# EAGLE board Conception_analyse_schemas_pcb (EAGLE 9.7.0)
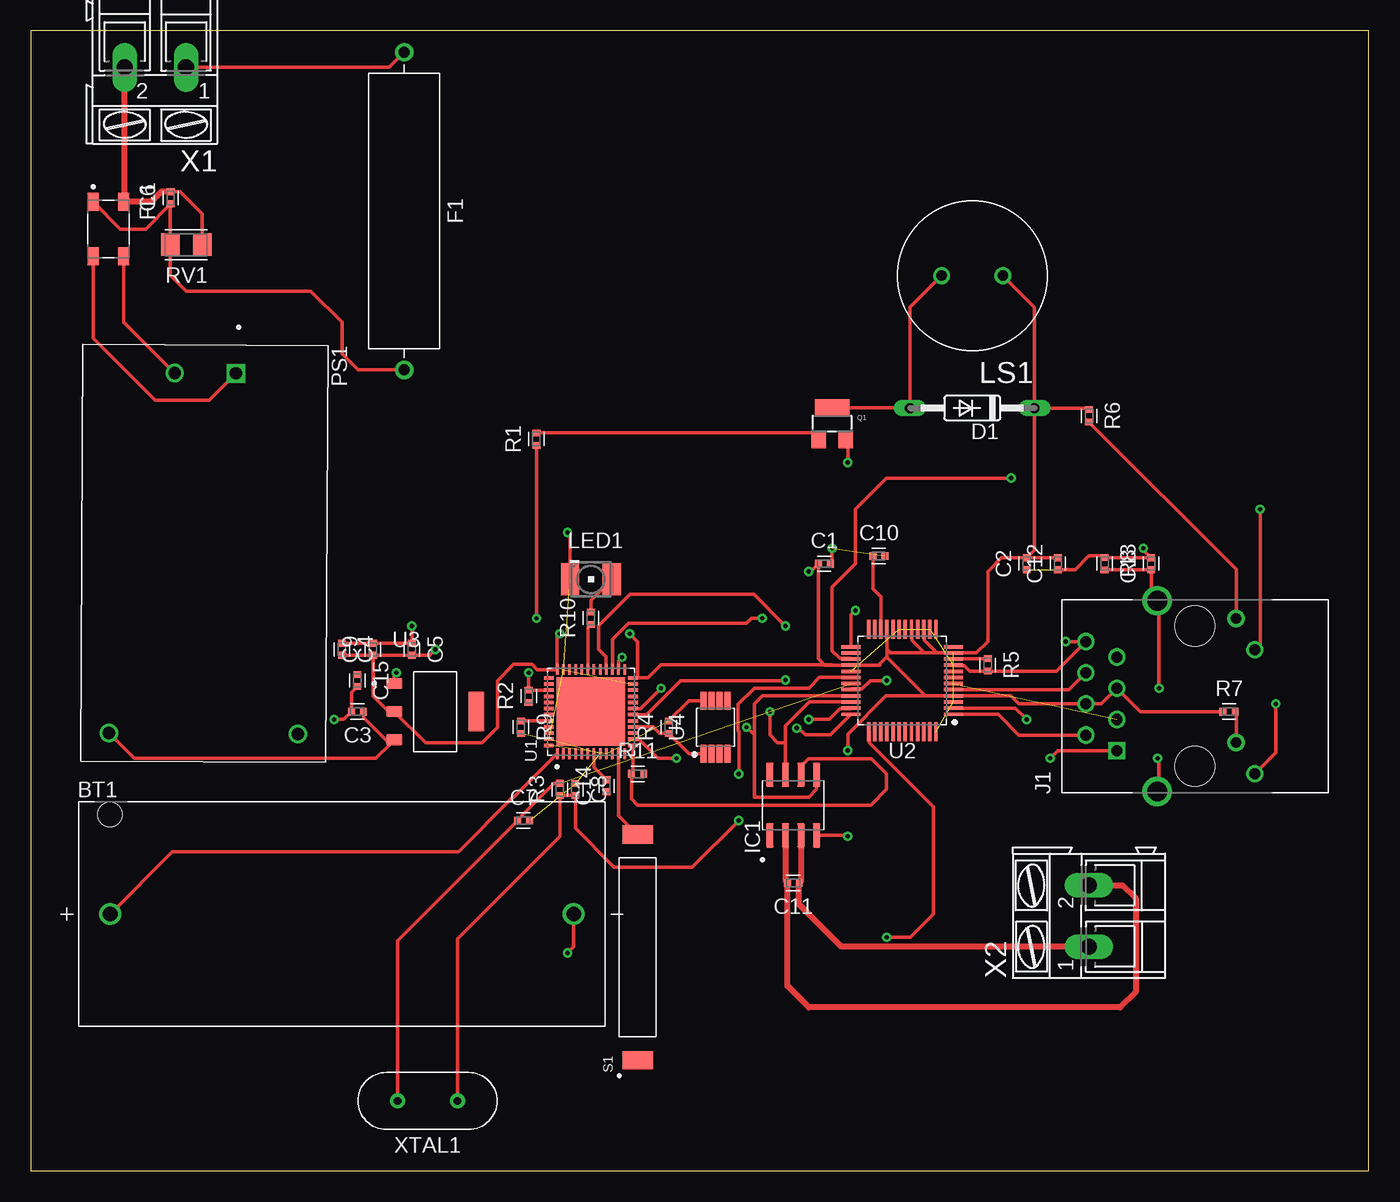
[diagram p0: board, top side]
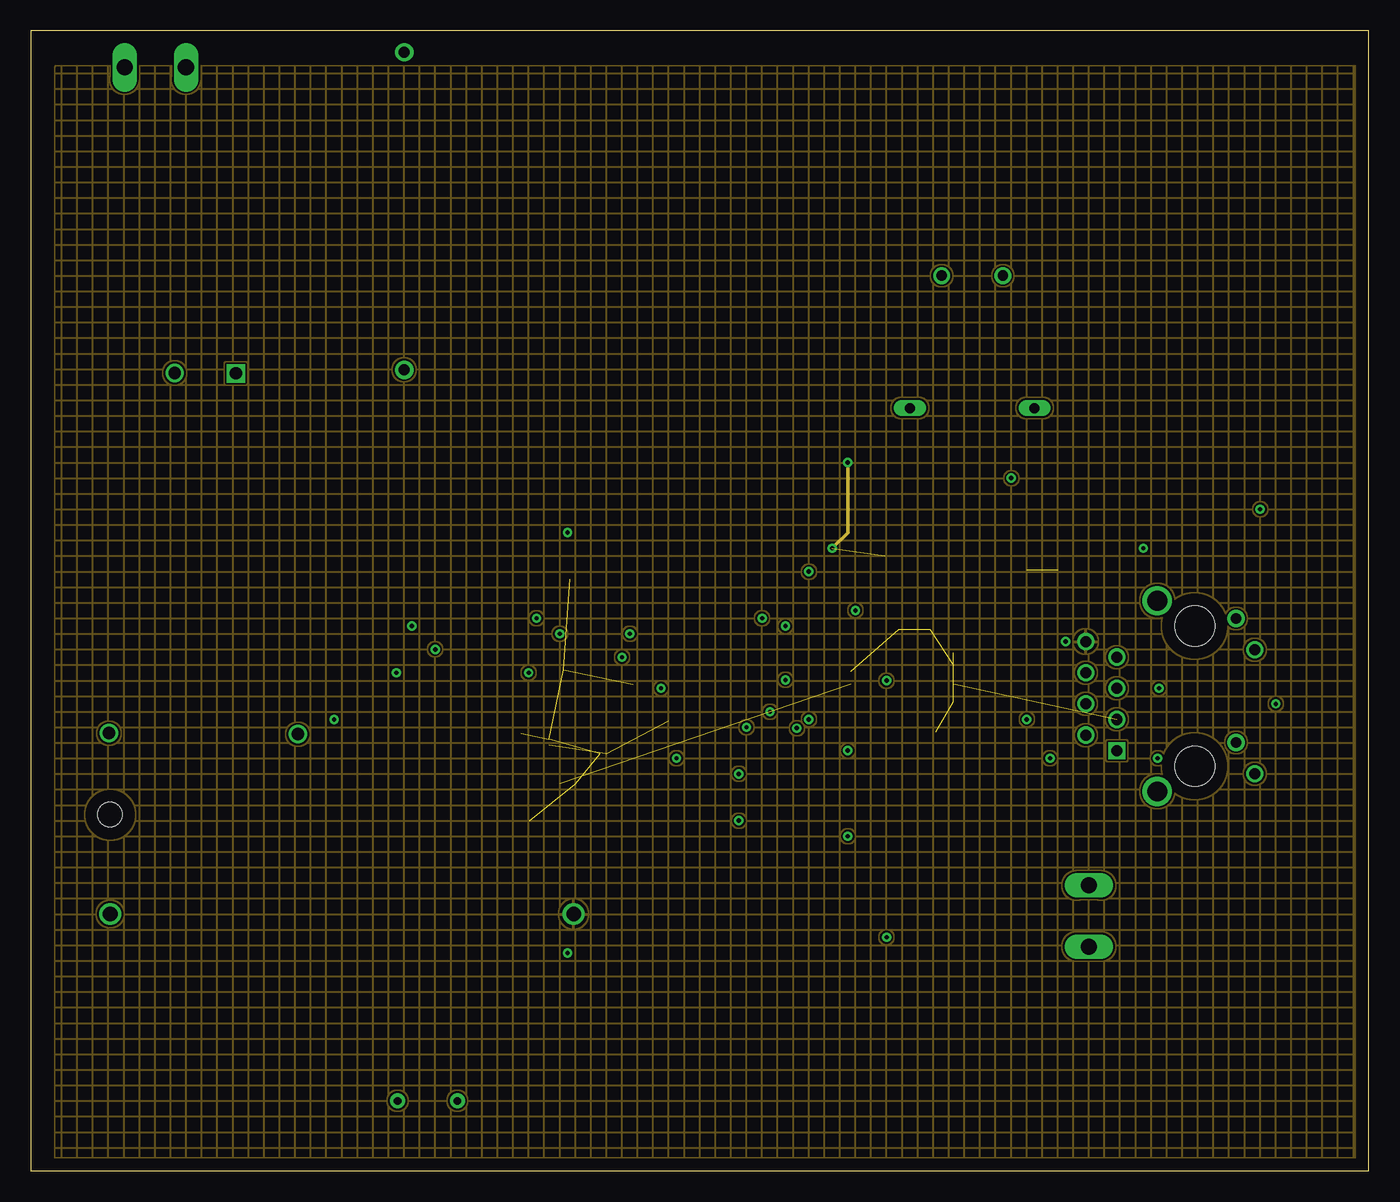
[diagram p1: board, inner layer Route2]
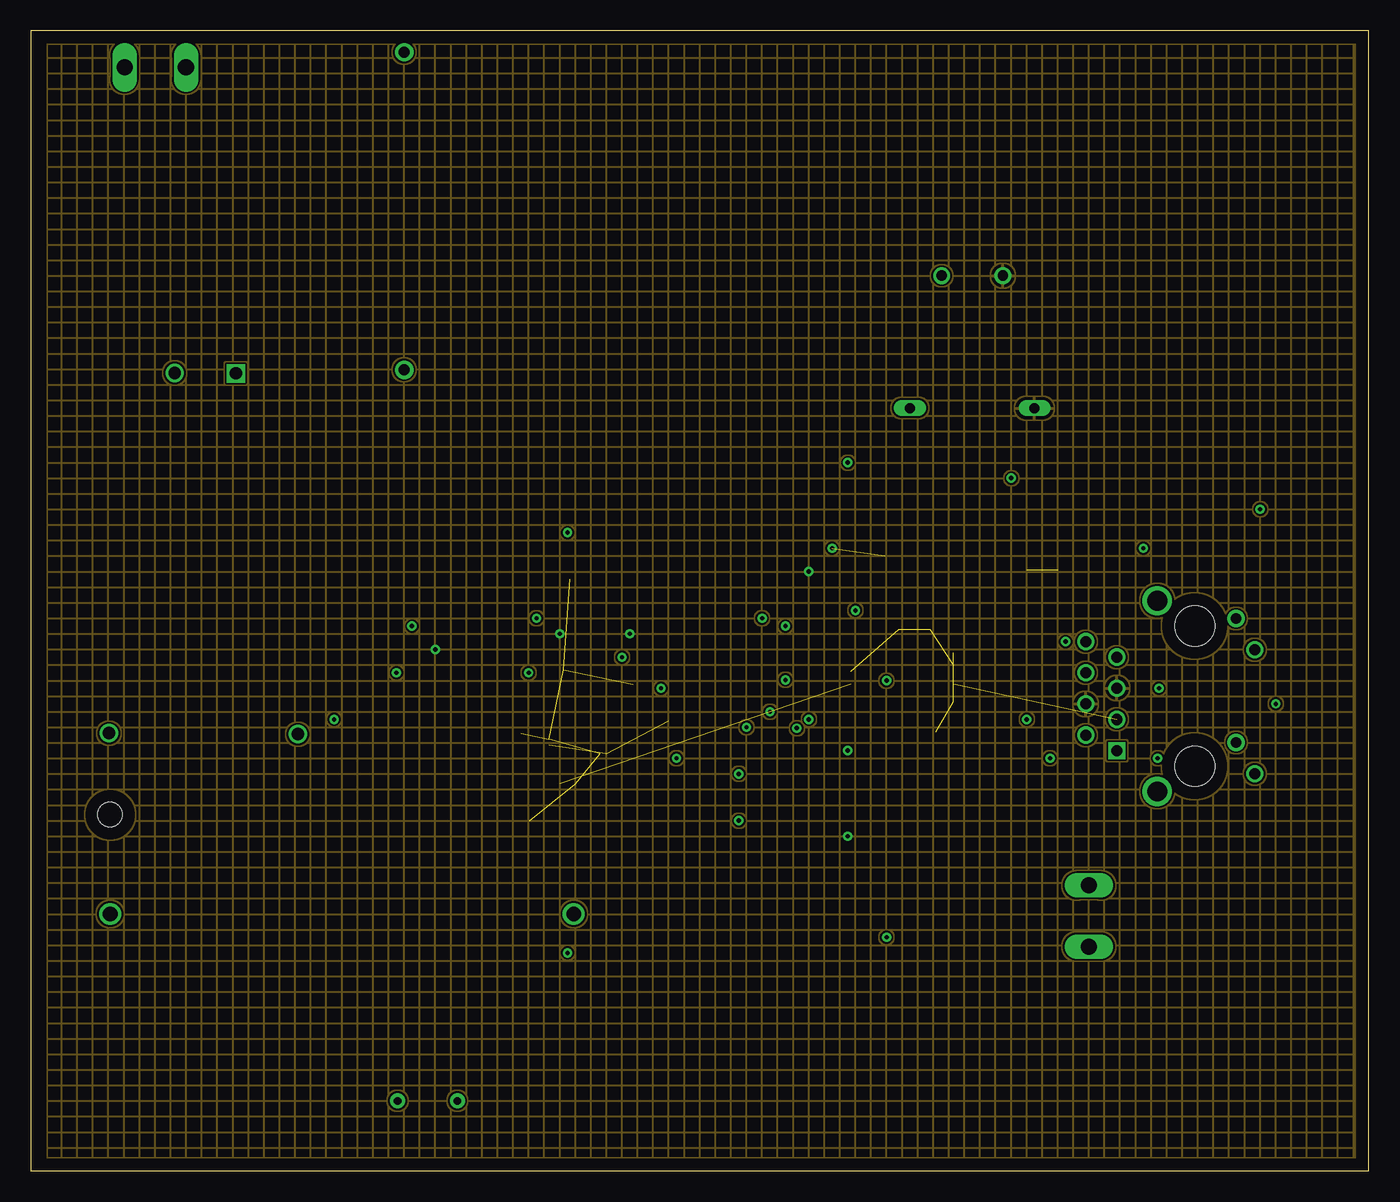
[diagram p2: board, inner layer Route15]
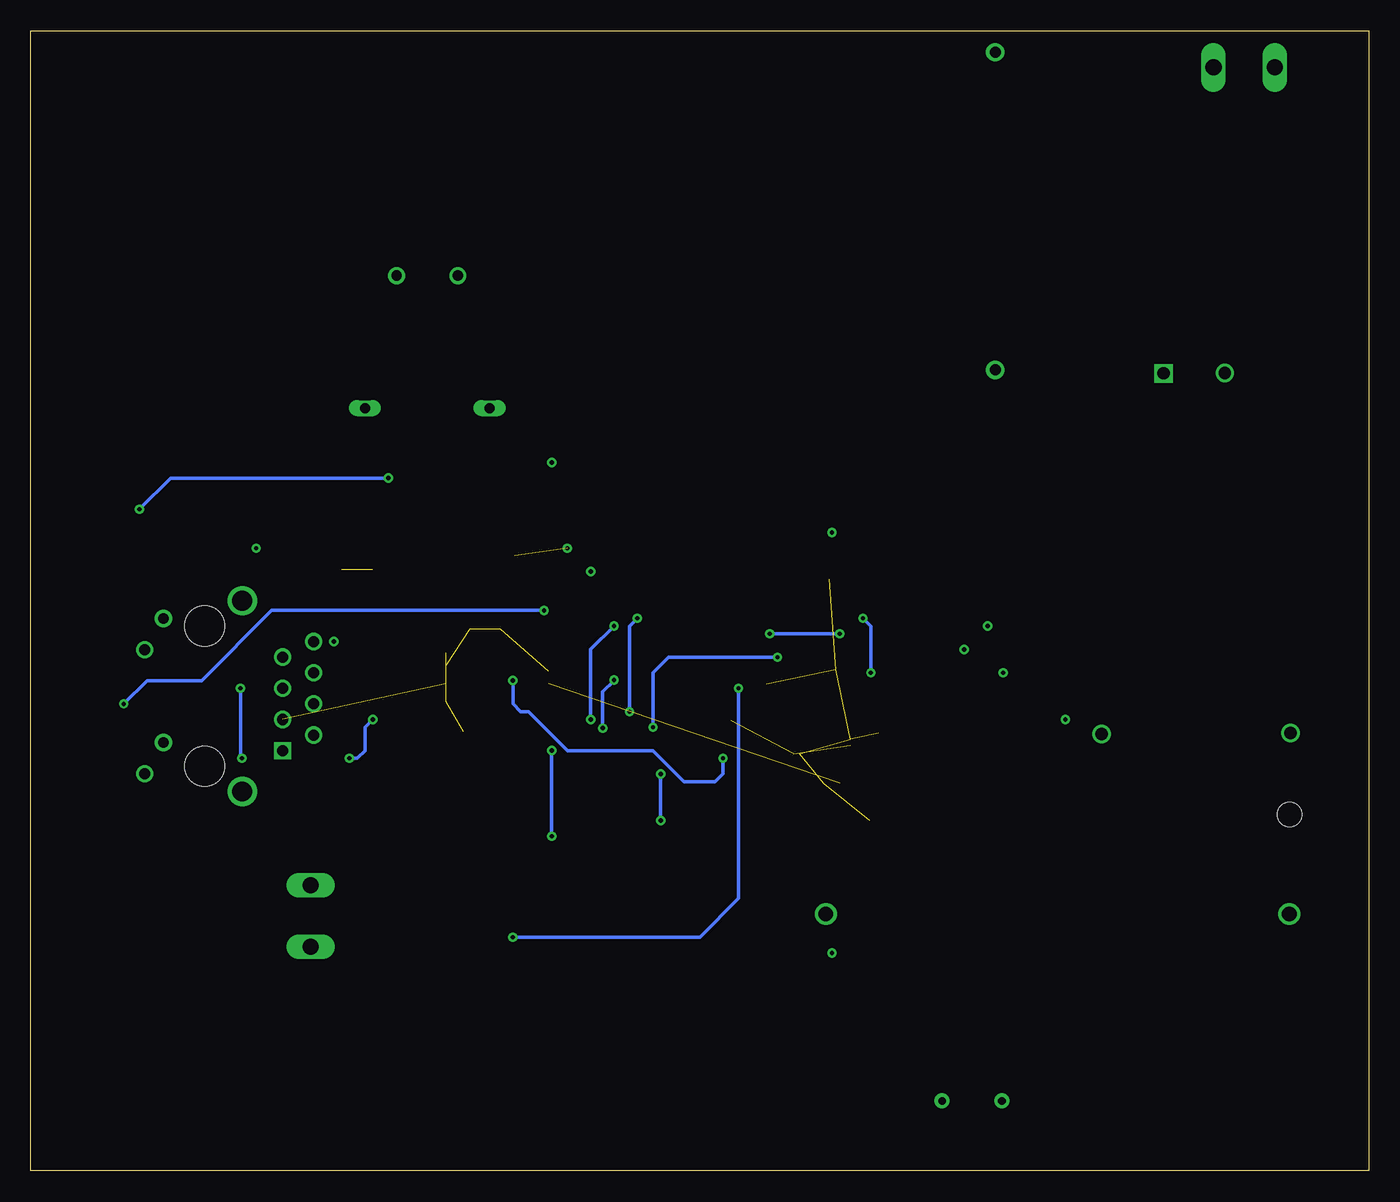
[diagram p3: board, bottom side, seen from below]

Size 109.2 x 93.02 mm. Coordinates in mm from the lower left corner, seen from the top.
Outline: 0,0 109.2,0 109.2,93.02 0,93.02 0,0
Copper layers (1+2*15+16): Top 0.035mm / dielectric 1.5mm / Route2 0.035mm / dielectric 0.15mm / Route15 0.035mm / dielectric 0.2mm / Bottom 0.035mm
Design rules "Fusion Electronics Design Rules *": minimum track width 0.3mm, minimum drill 0.35mm, track to track 6mil, track to pad 6mil, pad to pad 6mil, via to via 6mil, smd to smd 6mil, copper to edge 40mil, drill to drill 6mil, minimum pad ring 10mil, minimum via ring 8mil, stop-mask expansion 4mil, vias tented up to drill 9999mil, thermal gap 10mil

## Footprints (pad centres in the part's own frame; a part is rotated, then mirrored left to right if it is on the bottom)
BAT_1051 = drill 1.19: N 18.91,0; P -18.91,0 | hole 1.98: -18.91,8.1
CAPC1005X60 = smd 0.56 x 0.629: 1 -0.485,0; 2 0.485,0
DO35-10 = drill 0.813 long: A 5.08,0; C -5.08,0
FUSAD2590W70L2150D550B = drill 0.9 pad 1.5: 1 -12.95,0; 2 12.95,0
FIL_DLW43SH510XK2K = smd 1.45 x 0.9: 1 -2.225,-1.25; 2 2.225,-1.25; 3 2.225,1.25; 4 -2.225,1.25
SOIC127P600X175-8N = smd 1.97 x 0.59: 1 -2.475,1.905; 2 -2.475,0.635; 3 -2.475,-0.635; 4 -2.475,-1.905; 5 2.475,-1.905; 6 2.475,-0.635; 7 2.475,0.635; 8 2.475,1.905
CONN_RJMG1BD3B8K1ANR = drill 1.6: 1 -7.775,3.05; 2 7.775,3.05 | drill 0.89: L1 6.325,-3.38; L2 3.785,-4.9; L3 -3.785,-3.38; L4 -6.325,-4.9 | drill 0.9 square: R1 -4.45,6.34 | drill 0.9: R2 -3.18,8.88; R3 -1.91,6.34; R4 -0.63,8.88; R5 0.64,6.34; R6 1.91,8.88; R7 3.18,6.34; R8 4.45,8.88 | hole 3.25: -5.715,0; 5.715,0
PLCC2 = smd 2.6 x 1.5: A 0,1.7; C 0,-1.7
XDCR_PS1240P02BT = drill 0.85 pad 1.28: 1 -2.5,0; 2 2.5,0
CONV_HLK-PM01 = drill 1 square: 1 -14.7,2.5 | drill 1: 2 -14.7,-2.5; 3 14.7,7.7; 4 14.7,-7.7
SOT23-W = smd 1.2 x 1.4: 1 -1.1,-1.3; 2 1.1,-1.3 | smd 2.8 x 1.4: 3 0,1.3
RESC1005X40 = smd 0.535 x 0.644: 1 -0.507,0; 2 0.507,0
VARC3216X102N = smd 1.505 x 1.815: 1 -1.305,0; 2 1.305,0
SW_PMC-1001THY = smd 1.5 x 2.5: 1 -9.2,0; 2 9.2,0
QFN50P700X700X60-49N = smd 0.86 x 0.27: 1 -3.435,2.75; 2 -3.435,2.25; 3 -3.435,1.75; 4 -3.435,1.25; 5 -3.435,0.75; 6 -3.435,0.25; 7 -3.435,-0.25; 8 -3.435,-0.75; 9 -3.435,-1.25; 10 -3.435,-1.75; 11 -3.435,-2.25; 12 -3.435,-2.75; 25 3.435,-2.75; 26 3.435,-2.25; 27 3.435,-1.75; 28 3.435,-1.25; 29 3.435,-0.75; 30 3.435,-0.25; 31 3.435,0.25; 32 3.435,0.75; 33 3.435,1.25; 34 3.435,1.75; 35 3.435,2.25; 36 3.435,2.75 | smd 0.27 x 0.86: 13 -2.75,-3.435; 14 -2.25,-3.435; 15 -1.75,-3.435; 16 -1.25,-3.435; 17 -0.75,-3.435; 18 -0.25,-3.435; 19 0.25,-3.435; 20 0.75,-3.435; 21 1.25,-3.435; 22 1.75,-3.435; 23 2.25,-3.435; 24 2.75,-3.435; 37 2.75,3.435; 38 2.25,3.435; 39 1.75,3.435; 40 1.25,3.435; 41 0.75,3.435; 42 0.25,3.435; 43 -0.25,3.435; 44 -0.75,3.435; 45 -1.25,3.435; 46 -1.75,3.435; 47 -2.25,3.435; 48 -2.75,3.435 | smd 5.6 x 5.6: 49 0,0
QFP50P900X900X160-48N = smd 1.559 x 0.28: 1 -4.178,2.75; 2 -4.178,2.25; 3 -4.178,1.75; 4 -4.178,1.25; 5 -4.178,0.75; 6 -4.178,0.25; 7 -4.178,-0.25; 8 -4.178,-0.75; 9 -4.178,-1.25; 10 -4.178,-1.75; 11 -4.178,-2.25; 12 -4.178,-2.75; 25 4.178,-2.75; 26 4.178,-2.25; 27 4.178,-1.75; 28 4.178,-1.25; 29 4.178,-0.75; 30 4.178,-0.25; 31 4.178,0.25; 32 4.178,0.75; 33 4.178,1.25; 34 4.178,1.75; 35 4.178,2.25; 36 4.178,2.75 | smd 0.28 x 1.559: 13 -2.75,-4.178; 14 -2.25,-4.178; 15 -1.75,-4.178; 16 -1.25,-4.178; 17 -0.75,-4.178; 18 -0.25,-4.178; 19 0.25,-4.178; 20 0.75,-4.178; 21 1.25,-4.178; 22 1.75,-4.178; 23 2.25,-4.178; 24 2.75,-4.178; 37 2.75,4.178; 38 2.25,4.178; 39 1.75,4.178; 40 1.25,4.178; 41 0.75,4.178; 42 0.25,4.178; 43 -0.25,4.178; 44 -0.75,4.178; 45 -1.25,4.178; 46 -1.75,4.178; 47 -2.25,4.178; 48 -2.75,4.178
SOT229P700X180-4N = smd 1.31 x 0.93: 1 -3.345,2.29; 2 -3.345,0; 3 -3.345,-2.29 | smd 1.31 x 3.24: 4 3.345,0
SOP65P491X110-8N = smd 1.472 x 0.485: 1 -2.155,0.975; 2 -2.155,0.325; 3 -2.155,-0.325; 4 -2.155,-0.975; 5 2.155,-0.975; 6 2.155,-0.325; 7 2.155,0.325; 8 2.155,0.975
AK300/2 = drill 1.321 long: 1 -2.515,0; 2 2.489,0
XTALRR488W43L1135T465H1346B = drill 0.63 pad 1.23: 1 -2.44,0; 2 2.44,0

## Placement (x,y rotation side)
BT1  1051  [BAT_1051]  25.4,20.96 0 top
C1  100n  [CAPC1005X60]  64.77,49.53 0 top
C2  100n  [CAPC1005X60]  81.28,49.53 90 top
C3  10u  [CAPC1005X60]  26.67,37.47 180 top
C4  22u  [CAPC1005X60]  25.4,42.55 270 top
C5  47u  [CAPC1005X60]  31.11,42.55 270 top
C6  [CAPC1005X60]  11.43,79.38 90 top
C7  22p  [CAPC1005X60]  40.22,28.58 0 top
C8  22p  [CAPC1005X60]  44.45,31.12 270 top
C9  100n  [CAPC1005X60]  27.94,42.55 90 top
C10  10u  [CAPC1005X60]  69.22,50.16 0 top
C11  10n  [CAPC1005X60]  62.23,23.5 180 top
C12  100n  [CAPC1005X60]  83.82,49.53 90 top
C13  4.7n  [CAPC1005X60]  91.44,49.53 90 top
C14  100n  [CAPC1005X60]  46.99,31.41 90 top
C15  100n  [CAPC1005X60]  26.67,40.01 270 top
D1  1N4148DO35-10  [DO35-10]  76.83,62.23 180 top
F1  [FUSAD2590W70L2150D550B]  30.48,78.3 270 top
FL1  DLW43SH510XK2K  [FIL_DLW43SH510XK2K]  6.35,76.83 270 top
IC1  MAX31855KASA+T  [SOIC127P600X175-8N]  62.23,29.84 90 top
J1  RJMG1BD3B8K1ANR  [CONN_RJMG1BD3B8K1ANR]  94.98,38.73 90 top
LED1  LS_T679-D2E2-1  [PLCC2]  45.72,48.26 270 top
LS1  PS1240P02BT  [XDCR_PS1240P02BT]  76.83,73.03 180 top
PS1  HLK-PM01  [CONV_HLK-PM01]  14.18,50.37 269.7 top
Q1  [SOT23-W]  65.41,60.96 0 top
R1  1k  [RESC1005X40]  41.27,59.69 90 top
R2  10k  [RESC1005X40]  40.64,38.73 90 top
R3  1M  [RESC1005X40]  43.18,31.12 90 top
R4  4.7k  [RESC1005X40]  52.07,36.2 90 top
R5  12.4k  [RESC1005X40]  78.11,41.27 270 top
R6  330  [RESC1005X40]  86.36,61.59 270 top
R7  330  [RESC1005X40]  97.79,37.47 0 top
R8  1M  [RESC1005X40]  87.63,49.53 270 top
R9  10k  [RESC1005X40]  40.01,36.2 270 top
R10  [RESC1005X40]  45.72,45.09 90 top
R11  [RESC1005X40]  49.53,32.38 0 top
RV1  [VARC3216X102N]  12.7,75.56 180 top
S1  PMC-1001THY  [SW_PMC-1001THY]  49.53,18.23 90 top
U1  STM32L452CCU6  [QFN50P700X700X60-49N]  45.72,37.47 90 top
U2  W5500_LQFP  [QFP50P900X900X160-48N]  71.12,40.01 180 top
U3  AMS1117-3.3  [SOT229P700X180-4N]  33.02,37.47 0 top
U4  DS18B20U_SOP  [SOP65P491X110-8N]  55.88,36.2 90 top
X1  [AK300/2]  10.16,90.02 180 top
X2  [AK300/2]  86.36,20.8 90 top
XTAL1  CRYSTAL_HC49-11L-13.5H  [XTALRR488W43L1135T465H1346B]  32.38,5.71 180 top

## Library data of the parts
BT1 = 1051; AVAILABILITY: In Stock; CHECK_PRICES: https://www.snapeda.com/parts/1051/Keystone/view-part/?ref=eda; DESCRIPTION: THM Battery Holder for CR123A Cell | Keystone Electronics 1051; MF: Keystone Electronics; MP: 1051; PACKAGE: NON STANDARD-3 Keystone; PRICE: None; SNAPEDA_LINK: https://www.snapeda.com/parts/1051/Keystone/view-part/?ref=snap
C1-C15 = Tutorial - Fusion 360; CATEGORY: Capacitor
D1 = diode
F1 = Circuit-Protection; CATEGORY: Circuit-Protection; PACKAGE_SIZE: 26MM-PITCH; PACKAGE_TYPE: THT; SUBCATEGORY: Fuse; TYPE: Axial
FL1 = DLW43SH510XK2K; AVAILABILITY: In Stock; CHECK_PRICES: https://www.snapeda.com/parts/DLW43SH510XK2K/Murata/view-part/?ref=eda; DESCRIPTION: Common Mode Chokes / Filters; MF: Murata; MP: DLW43SH510XK2K; PACKAGE: None; PRICE: None; SNAPEDA_LINK: https://www.snapeda.com/parts/DLW43SH510XK2K/Murata/view-part/?ref=snap
IC1 = MAX31855KASA_T; AVAILABILITY: In Stock; CHECK_PRICES: https://www.snapeda.com/parts/MAX31855KASA+T/Analog+Devices/view-part/?ref=eda; DESCRIPTION: Cold-Junction Compensated Thermocouple-to-Digital Converter; MF: Analog Devices; MP: MAX31855KASA+T; PACKAGE: SOIC-8 Maxim; PRICE: None; SNAPEDA_LINK: https://www.snapeda.com/parts/MAX31855KASA+T/Analog+Devices/view-part/?ref=snap
J1 = RJMG1BD3B8K1ANR; AVAILABILITY: In Stock; CHECK_PRICES: https://www.snapeda.com/parts/RJMG1BD3B8K1ANR/Amphenol+FCI/view-part/?ref=eda; DESCRIPTION: 1 Port RJ45 Magjack Connector Through Hole 10/100 Base-T, AutoMDIX; MF: FCI; MP: RJMG1BD3B8K1ANR; PACKAGE: None; PRICE: None; SNAPEDA_LINK: https://www.snapeda.com/parts/RJMG1BD3B8K1ANR/Amphenol+FCI/view-part/?ref=snap
LED1 = led; COLOR: super-red
LS1 = PS1240P02BT; AVAILABILITY: In Stock; CHECK_PRICES: https://www.snapeda.com/parts/PS1240P02BT/TDK/view-part/?ref=eda; DESCRIPTION: Buzzers Transducer, Externally Driven Piezo 3 V - 4kHz 60dB @ 3V, 10cm Through Hole PC Pins; MF: TDK Corporation; MP: PS1240P02BT; PACKAGE: Custom Package TDK; PRICE: None; SNAPEDA_LINK: https://www.snapeda.com/parts/PS1240P02BT/TDK/view-part/?ref=snap
PS1 = HLK-PM01; AVAILABILITY: Not in stock; CHECK_PRICES: https://www.snapeda.com/parts/hlk-pm01/Hi-link/view-part/?ref=eda; DESCRIPTION: The HLK-PM01 is a small size low cost AC to DC converter which can take in 110V/220V AC at 50/60 Hz and give 5V 3W output. The module is can be used in designs which run on 5V and needs to be powered form the AC mains.; MF: Hi-link; MP: hlk-pm01; PACKAGE: None; PRICE: None; SNAPEDA_LINK: https://www.snapeda.com/parts/hlk-pm01/Hi-link/view-part/?ref=snap
Q1 = adafruit
R1-R11 = Resistor; CATEGORY: Resistors; DESCRIPTION: Chip Resistor 1.05 X 0.54 X 0.40 mm body 0402(1005-METRIC) Package; PACKAGE_SIZE: 0402; PACKAGE_TYPE: SMD
RV1 = Circuit-Protection; CATEGORY: Circuit-Protection; PACKAGE_SIZE: 1206; PACKAGE_TYPE: SMD; SUBCATEGORY: Varistor
S1 = PMC-1001THY; AVAILABILITY: In Stock; CHECK_PRICES: https://www.snapeda.com/parts/PMC-1001THY/PIC/view-part/?ref=eda; DESCRIPTION: Housed SMD Reed Switch Form B 18.4 mm 10 W 0.7 A 180 VDC (N.C.); MF: PIC GmbH; MP: PMC-1001THY; PACKAGE: None; PRICE: None; SNAPEDA_LINK: https://www.snapeda.com/parts/PMC-1001THY/PIC/view-part/?ref=snap
U1 = STM32L452CCU6; AVAILABILITY: In Stock; CHECK_PRICES: https://www.snapeda.com/parts/STM32L452CCU6/STMicroelectronics/view-part/?ref=eda; DESCRIPTION: ARM® Cortex®-M4 STM32L4 Microcontroller IC 32-Bit Single-Core 80MHz 256KB (256K x 8) FLASH 48-UFQFPN (7x7); MF: STMicroelectronics; MP: STM32L452CCU6; PACKAGE: UFQFPN-48 STMicroelectronics; PRICE: None; SNAPEDA_LINK: https://www.snapeda.com/parts/STM32L452CCU6/STMicroelectronics/view-part/?ref=snap
U2 = IC_Interface; CATEGORY: Interface IC; DATASHEET: https://docs.wiznet.io/img/products/w5500/W5500_ds_v110e.pdf; DESCRIPTION: Ethernet Controller 10/100 Base-T/TX PHY SPI Interface 48-LQFP (7x7); MANUFACTURER: WIZnet; MPN: W5500; OPERATING_TEMPERATURE: -40°C ~ 85°C; PACKAGE_SIZE: 48-LQFP; PACKAGE_TYPE: SMD; PART_STATUS: ACTIVE; ROHS: COMPLIANT; SERIES: NA; SUBCATEGORY: Ethernet; TYPE: Controller
U3 = AMS1117-3.3; AVAILABILITY: Not in stock; CHECK_PRICES: https://www.snapeda.com/parts/AMS1117-3.3/Advanced+Monolithic+Systems/view-part/?ref=eda; DESCRIPTION: Sot223/Pkg 1-Amp 3.3-Volt Low Drop Out Voltage Regulatator; MF: Advanced Monolithic Systems; MP: AMS1117-3.3; PACKAGE: SOT-223 Seeed Technology; PRICE: None; SNAPEDA_LINK: https://www.snapeda.com/parts/AMS1117-3.3/Advanced+Monolithic+Systems/view-part/?ref=snap
U4 = Sensor; CATEGORY: Sensors & Transducers; DATASHEET: https://datasheets.maximintegrated.com/en/ds/DS18B20.pdf; DESCRIPTION: Temperature Sensor Digital - Local -55°C ~ 125°C 12 b 8-uMAX/uSOP; MANUFACTURER: Analog Devices Inc./Maxim Integrated; MPN: DS18B20U+; OPERATING_TEMPERATURE: -55°C ~ 125°C; PACKAGE_SIZE: 8-TSSOP; PACKAGE_TYPE: SMD; PART_STATUS: ACTIVE; ROHS: COMPLIANT; SERIES: DS18B20; SUBCATEGORY: Temperature Sensors; TYPE: Digital Output
X1 X2 = con-ptr500; OC_FARNELL: unknown; OC_NEWARK: unknown
XTAL1 = Frequency-Source; CATEGORY: Crystals; PACKAGE_SIZE: HC-49/US; PACKAGE_TYPE: THT

## Nets
3V1: C15.1
3V3: C1.1 C2.2 C4.2 C5.2 C9.1 C12.2 D1.C IC1.4 J1.R4 J1.R5 LS1.1 R6.1 R7.1 U1.24 U1.36 U2.4 U2.8 U2.11 U2.15 U2.17 U2.21 U2.28 U3.2
5V: C3.1 PS1.4 U3.3
ACTLED: J1.L2 U2.27
AGND: BT1.N C1.2 C2.1 C3.2 C4.1 C5.1 C7.2 C8.1 C9.2 C10.2 C12.1 C13.2 C15.2 J1.R8 LED1.C Q1.2 R5.2 R8.1 R9.2 U1.8 U1.23 U1.35 U1.47 U2.3 U2.9 U2.14 U2.16 U2.19 U2.29 U2.48 U3.1
BUZZ: R1.1 R2.2 U1.39
CS: IC1.6 R11.1 U1.13
DQ: R4.1 U1.16 U4.1
EXP: U1.49
INTN: U1.18 U2.36
LINKLED: J1.L4 U2.25
MISO: IC1.7 U1.27 U2.34
MOSI: U1.28 U2.35
N$1: Q1.1 R1.2
N$2: F1.1 X1.1
N$3: D1.A LS1.2 Q1.3
N$4: C6.1 F1.2 FL1.1 RV1.2
N$5: C6.2 FL1.4 RV1.1 X1.2
N$6: FL1.3 PS1.2
N$7: FL1.2 PS1.1
N$8: C7.1 R3.2 U2.31 XTAL1.2
N$9: C8.2 R3.1 U2.30 XTAL1.1
N$10: C10.1 U2.22
N$11: S1.2 U1.11
N$12: C11.1 IC1.3 X2.1
N$13: BT1.P U1.1
N$14: R5.1 U2.10
N$15: C11.2 IC1.2 X2.2
N$16: J1.L1 R6.2
N$17: J1.L3 R7.2
N$18: C13.1 J1.1 J1.2 R8.2
N$19: R9.1 U1.44
N$20: C14.2 U1.7
N$21: LED1.A R10.2
PA10: R10.1 U1.31
RSTN: U1.19 U2.37
RXN: J1.R6 U2.5
RXP: J1.R3 U2.6
S$1: R4.2 U1.9 U1.48 U4.8
SCLK: IC1.5 U1.26 U2.33
SCSN: U1.14 U2.32
TXN: J1.R2 U2.1
TXP: J1.R1 U2.2

## Tracks (layer width: path | path; a pad name or v marks a point on that pad's centre or on a via)
3V3  (via drill 0.35)  (1 unrouted)
  Top 0.3: C9.1 27.94,38.73 29.21,37.47 U3.2 32.22,34.92 36.83,34.92 38.1,36.2 38.1,40.01 39.42,41.32 40.92,41.32 41.34,40.9 U1.36 42.97,43.61 v43.18,43.81 | C9.1 C5.2 32.53,42.06 v33.02,42.55 | C4.2 C9.1 | LS1.1 81.92,70.45 D1.C | D1.C 86.23,62.23 R6.1 | R7.1 90.56,37.47 J1.R5 87.38,38.11 J1.R4 80.64,38.11 80,38.76 U2.4 73,38.76 | D1.C 81.92,50.65 C2.2 | C2.2 C12.2 | 65.41,41.26 64.79,41.26 64.28,41.76 C1.1 63.65,48.9 v63.5,48.9 | 65.41,41.26 U2.28 69.19,41.26 | 69.87,41.93 69.87,42.55 | 69.87,42.55 U2.21 69.82,44.14 69.82,44.13 | 69.87,41.93 69.19,41.26 | 69.29,41.26 69.19,41.26 | U1.24 49.53,40.22 | 49.53,40.22 50.38,40.22 51.44,41.27 65.39,41.27 65.41,41.26 | v48.9,43.81 49.53,43.18 49.53,40.22 | C2.2 79.22,50.02 78.11,48.9 78.11,43.18 77.18,42.26 U2.11 73.95,42.26 | IC1.4 66.61,27.37 v66.67,27.3 | v66.67,34.29 66.67,35.64 69.79,38.76 73,38.76 | U2.15 72.93,44.13 72.93,43.28 73.95,42.26 | U2.17 71.93,44.13 71.93,43.28 72.95,42.26 | 73.95,42.26 72.95,42.26 | 72.95,42.26 70.16,42.26 69.87,42.55 | 73,38.76 69.87,41.89 69.87,41.93
  Bottom 0.3: v43.18,43.81 v48.9,43.81 | v66.67,27.3 v66.67,34.29
  pour Route15 (hatched): 1.35,-0.56 111.73,-0.56 112.32,0.03 112.32,91.41 111.73,92 1.35,92
5V
  Top 0.3: U3.3 29.32,34.82 | 29.32,34.82 28.16,33.66 8.46,33.66 PS1.4 | C3.1 27.16,36.98 29.32,34.82
ACTLED  (via drill 0.35)
  Top 0.3: U2.27 66.88,41.81 66.04,41.81 65.41,42.45 65.41,47.62 67.31,49.53 67.31,53.98 69.85,56.52 v80.01,56.52 | v100.33,53.98 100.33,42.97 J1.L2
  Bottom 0.3: v80.01,56.52 97.79,56.52 v100.33,53.98
AGND  (via drill 0.35)  (15 unrouted)
  Top 0.3: U2.9 75.36,41.2 76.2,41.2 76.63,40.77 R5.2 83.69,40.77 J1.R8 v84.45,43.18 | C1.2 65.41,49.68 v65.41,50.8 | Q1.2 66.67,59.49 v66.67,57.78 | BT1.N 44.31,18.28 v43.81,17.78 | LED1.C 44.02,51.87 v43.81,52.07 | U3.1 29.68,40.47 v29.84,40.64 | C15.2 26.18,39.04 C3.2 25.55,36.83 v24.77,36.83 | C4.1 C9.2 C5.1 v31.11,44.45 | C12.1 85.24,49.05 86.36,50.16 87.5,50.16 R8.1 91.42,50.04 C13.2 90.81,50.65 v90.81,50.8
  Route2 0.3: v66.67,57.78 66.67,52.07 v65.41,50.8
  pour Route2 (hatched): 1.98,-3.73 110.41,-3.73 110.41,89.5 109.82,90.09 1.98,90.09
BUZZ  (via drill 0.35)
  Top 0.3: U1.39 40.67,39.22 R2.2 v40.64,40.64 | R1.1 v41.27,45.09
  Bottom 0.3: v41.27,45.09 40.64,44.45 v40.64,40.64
CS
  Top 0.3: U1.13 49.16,32.52 R11.1 49.02,30.35 49.53,29.84 68.58,29.84 69.85,31.12 69.85,32.38 68.63,33.61 63.45,33.61 62.87,33.02 IC1.6
DQ
  Top 0.3: U4.1 53.72,34.04 R4.1 51.31,35.69 50.78,36.22 U1.16
INTN  (via drill 0.35)
  Top 0.3: v61.59,40.05 61.55,40.01 53.03,40.01 50.24,37.22 U1.18 | U2.36 65.25,35.56 63.23,35.56 62.67,36.12 v62.52,36.12
  Bottom 0.3: v61.59,40.05 61.59,40.01 62.52,39.08 v62.52,36.12
LINKLED  (via drill 0.35)
  Top 0.3: U2.25 66.94,45.35 v67.31,45.72 | v101.6,38.1 101.6,34.12 J1.L4
  Bottom 0.3: v67.31,45.72 89.53,45.72 95.25,40.01 99.69,40.01 v101.6,38.1
MISO  (via drill 0.35)
  Top 0.3: IC1.7 61.59,34.92 | v60.33,37.47 60.33,35.56 60.96,34.92 61.59,34.92 | 61.59,34.92 61.59,36.3 63.55,38.26 U2.34 | v59.69,45.09 58.81,45.09 58.4,44.68 48.8,44.68 47.47,43.35 U1.27
  Bottom 0.3: v59.69,45.09 60.33,44.45 v60.33,37.47
MOSI  (via drill 0.35)
  Top 0.3: U1.28 46.97,41.93 46.35,42.55 46.35,44.49 48.9,47.04 59.01,47.04 v61.59,44.45 | U2.35 66.89,37.71 66.05,37.71 65.17,36.83 v63.5,36.83
  Bottom 0.3: v61.59,44.45 63.5,42.55 v63.5,36.83
N$1
  Top 0.3: R1.2 63.77,60.2 Q1.1
N$2
  Top 0.3: X1.1 29.25,90.02 F1.1
N$3
  Top 0.3: LS1.2 71.75,70.45 D1.A 71.72,62.26 Q1.3
N$4
  Top 0.3: F1.2 26.73,65.35 25.4,66.67 25.4,69.22 22.86,71.75 12.7,71.75 11.39,73.06 RV1.2 11.39,78.86 | 11.39,78.86 C6.1 | FL1.1 7.33,76.83 9.38,76.83 11.39,78.86
N$5
  Top 0.3: RV1.1 14.01,78.07 12.21,79.86 C6.2 | FL1.4 7.67,79.13
  Top 0.5: C6.2 10.64,79.86 9.85,79.06 FL1.4 | 7.67,79.13 X1.2
N$6
  Top 0.3: PS1.2 7.6,69.24 FL1.3
N$7
  Top 0.3: PS1.1 14.56,62.86 10.16,62.86 5.1,67.92 FL1.2
N$8  (1 unrouted)
  Top 0.3: R3.2 42.73,31.62 40.12,29.02 40.12,28.96 C7.1 29.95,18.79 XTAL1.2
N$9  (via drill 0.35)
  Top 0.3: XTAL1.1 34.83,18.95 43.18,27.3 R3.1 43.2,30.63 C8.2 44.45,27.94 47.62,24.77 53.98,24.77 v57.78,28.58 | U2.30 64.39,40.26 63.5,39.37 59.05,39.37 57.74,38.05 57.74,35.91 57.78,35.87 v57.78,32.38
  Bottom 0.3: v57.78,28.58 v57.78,32.38
N$10
  Top 0.3: C10.1 68.73,47.48 69.37,46.84 U2.22
N$11
  Top 0.3: S1.2 47.97,28.99 U1.11
N$12
  Top 0.3: 62.87,23.64 C11.1
  Top 0.5: IC1.3 62.87,23.64 | X2.1 66.17,18.29 62.72,21.74 C11.1
N$13
  Top 0.3: BT1.P 11.57,26.04 34.9,26.04 39.33,30.46 39.4,30.46 U1.1
N$14
  Top 0.3: R5.1 75.33,41.78 U2.10
N$15
  Top 0.3: 61.59,23.64 C11.2
  Top 0.5: IC1.2 61.59,23.64 | X2.2 89.1,23.29 90.17,22.23 90.17,14.61 88.9,13.34 63.5,13.34 61.74,15.09 C11.2
N$16
  Top 0.3: R6.2 98.36,49.08 J1.L1
N$17
  Top 0.3: R7.2 98.36,37.4 J1.L3
N$18  (via drill 0.35)
  Top 0.3: J1.1 92.08,31.1 92.08,33.66 v91.97,33.66 | v92.08,39.37 92.08,46.37 J1.2 91.44,47.01 C13.1 91.42,49.02 R8.2
  Bottom 0.3: v91.97,33.66 92.08,33.76 v92.08,39.37
N$19
  Top 0.3: R9.1 U1.44
N$20
  Top 0.3: C14.2 45.97,32.92 U1.7
N$21
  Top 0.3: R10.2 45.72,46.56 LED1.A
PA10
  Top 0.3: R10.1 45.47,44.33 U1.31
RSTN  (via drill 0.35)
  Top 0.3: U2.37 68.43,35.77 68.43,34.92 73.66,29.69 73.66,20.96 71.77,19.07 v69.85,19.07 | v51.44,39.37 49.78,37.72 U1.19
  Bottom 0.3: v51.44,39.37 51.44,22.23 54.59,19.07 v69.85,19.07
RXN
  Top 0.3: J1.R6 84.72,39.26 U2.5
RXP  (1 unrouted)
S$1  (2 unrouted)
  Top 0.3: R4.2 53.72,38.35 U4.8
SCLK  (via drill 0.35)
  Top 0.3: IC1.5 64.14,31.12 63.5,30.48 59.05,30.48 59.05,35.56 | U2.33 59.71,38.76 59.05,38.1 59.05,35.56 | U1.26 47.97,41.62 v48.26,41.91 | v58.42,36.2 59.05,35.56
  Bottom 0.3: v48.26,41.91 57.15,41.91 58.42,40.64 v58.42,36.2
SCSN  (via drill 0.35)
  Top 0.3: U1.14 49.2,35.17 49.67,35.17 51.19,33.66 v52.7,33.66 | U2.32 67,39.31 67.85,39.31 68.54,40.01 v69.85,40.01
  Bottom 0.3: v69.85,40.01 69.85,38.1 69.22,37.47 68.58,37.47 65.41,34.29 58.42,34.29 55.88,31.75 53.34,31.75 52.7,32.38 v52.7,33.66
TXN
  Top 0.3: J1.R2 80.65,35.55 78.95,37.26 U2.1
TXP  (via drill 0.35)
  Top 0.3: U2.2 80.36,37.76 v81.28,36.83 | v83.19,33.66 83.81,34.29 J1.R1
  Bottom 0.3: v81.28,36.83 81.92,36.2 81.92,34.29 82.55,33.66 v83.19,33.66